# EAGLE board MD20A (EAGLE 9.6.2)
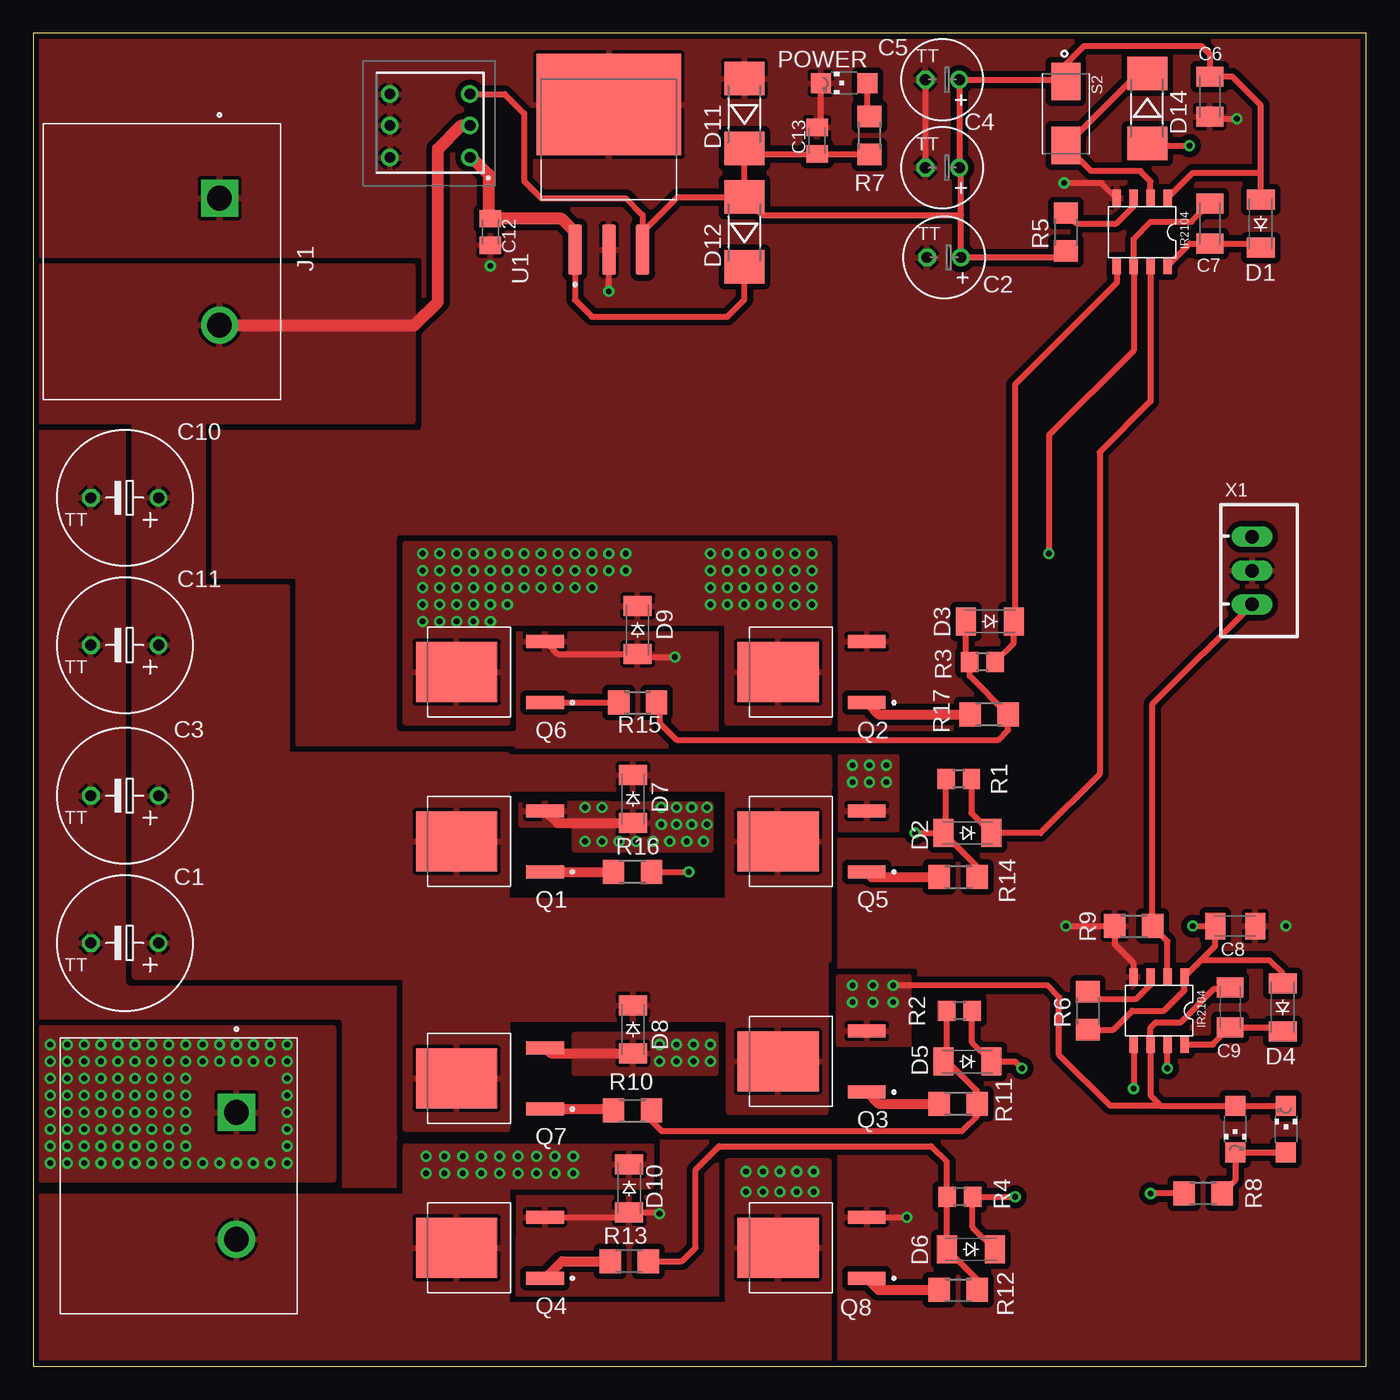
[diagram p0: board, top side]
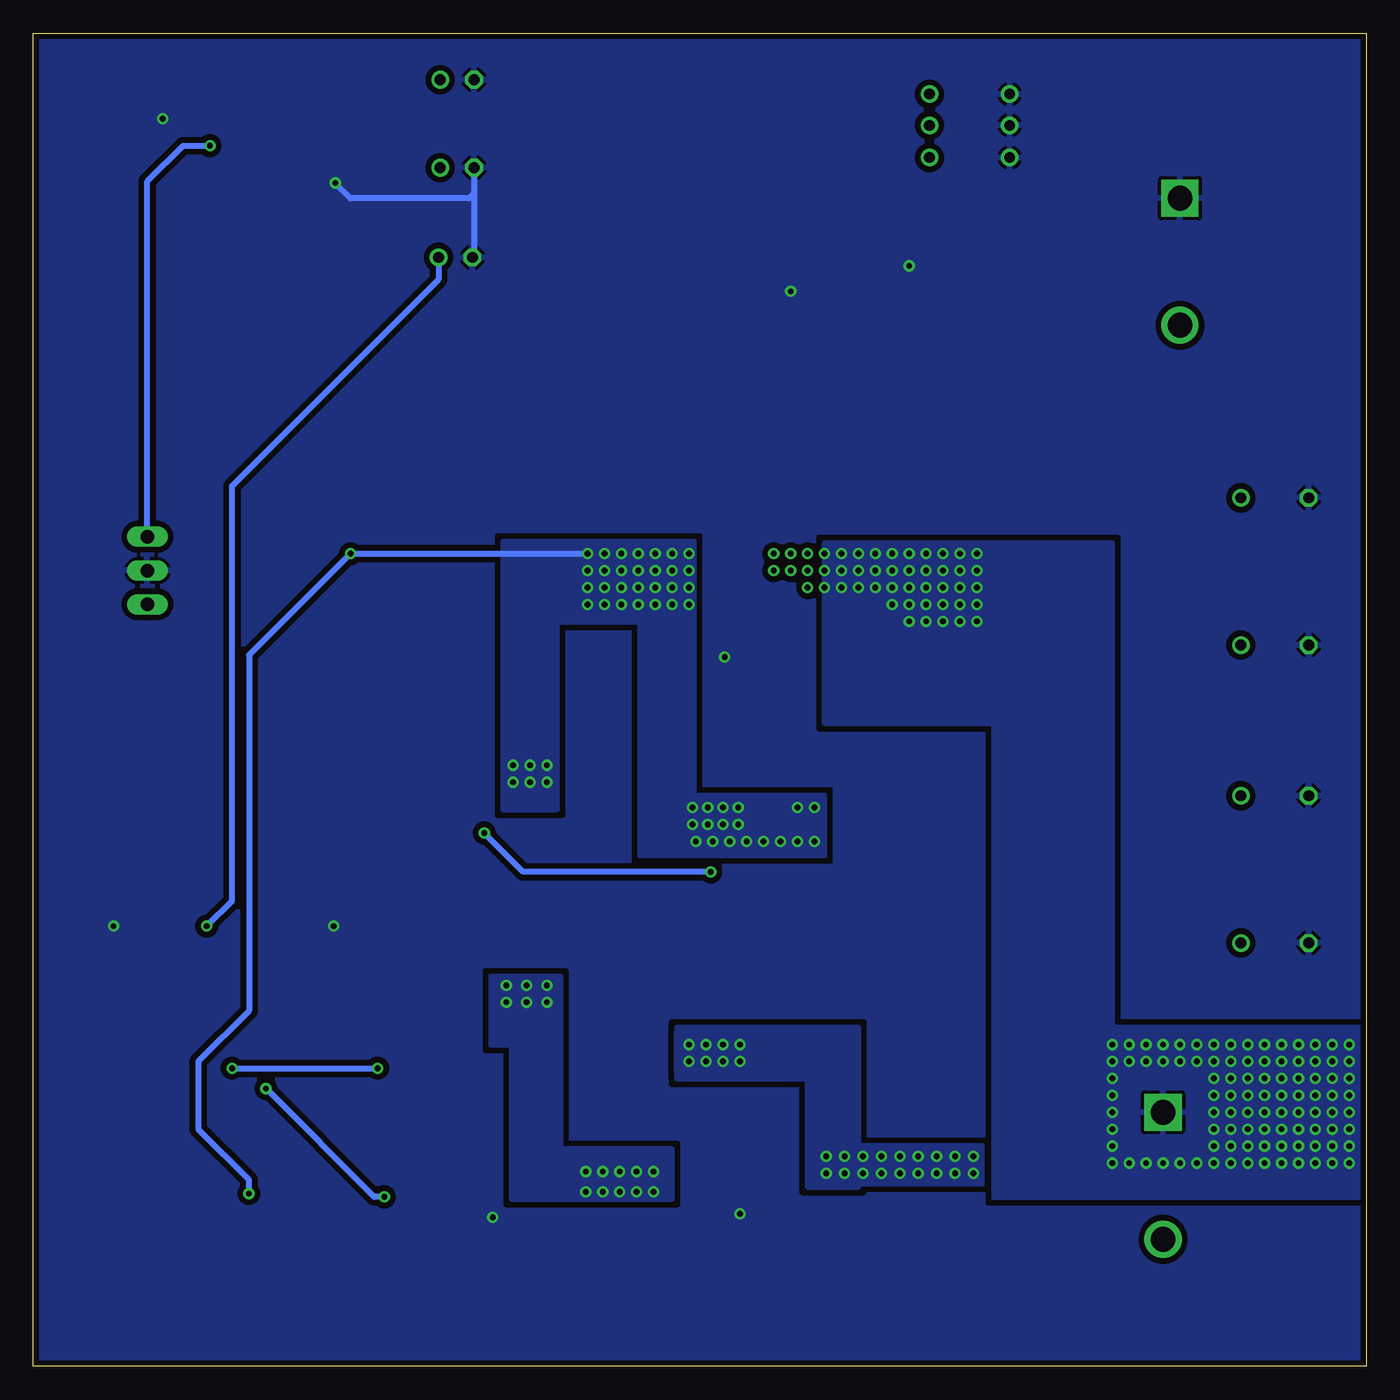
[diagram p1: board, bottom side, seen from below]

Size 100 x 100 mm. Coordinates in mm from the lower left corner, seen from the top.
Outline: 0,0 100,0 100,100 0,100 0,0
Copper layers (1*16): Top 0.035mm / dielectric 1.5mm / Bottom 0.035mm
Design rules "default *": minimum track width 17mil, minimum drill 17mil, track to track 17mil, track to pad 17mil, pad to pad 17mil, via to via 17mil, smd to smd 6mil, copper to edge 17mil, drill to drill 17mil, minimum pad ring 10mil, minimum via ring 8mil, stop-mask expansion 4mil, vias tented up to drill 0mil, thermal gap 10mil

## Footprints (pad centres in the part's own frame; a part is rotated, then mirrored left to right if it is on the bottom)
TT5D10 = drill 0.813: + -2.54,0 | drill 0.813 octagon: - 2.54,0
TT2D6 = drill 0.813: + -1.27,0 | drill 0.813 octagon: - 1.27,0
C1206K = smd 1.5 x 2: 1 -1.5,0; 2 1.5,0
C0805K = smd 1.3 x 1.6: 1 -1,0; 2 1,0
SOD-123_MINI-SMA = smd 1.5 x 2.1: A 1.8,0; C -1.8,0
MELF-MLL41 = smd 2.5 x 3: A 2.625,0; C -2.625,0
TE_4-1437652-6 = drill 1.854 pad 2.204 square: 1 0,0 | drill 1.854 pad 2.204: 2 9.53,0
CHIPLED_1206 = smd 1.5 x 1.5: A 0,-1.75; C 0,1.75
TO229P990X239-3_4N = smd 2.83 x 0.97: 1 -6.65,2.29; 3 -6.65,-2.29 | smd 6.1 x 4.49: 4 0,0
R0805 = smd 1.3 x 1.5: 1 -0.95,0; 2 0.95,0
R1206 = smd 1.6 x 1.803: 1 -1.422,0; 2 1.422,0
TL2230 = drill 0.8 pad 1.3: 1 -0.762,-1.016; 2 1.655,-1.016; 3 4,-1.016; 4 -0.762,5; 5 1.655,5; 6 4,5
SW_147873-2 = smd 2.8 x 2.2: 1 -2.4,0; 2 2.4,0
TO254P1524X483-4N = smd 3.79 x 0.99: 1 -6.4,2.54; 2 -6.4,0; 3 -6.4,-2.54 | smd 7.62 x 10.84: 4 4.48,0
IR2104S = smd 1.27 x 0.635: 1 0,3.81; 2 0,2.54; 3 0,1.27; 4 0,0; 5 5.08,0; 6 5.08,1.27; 7 5.08,2.54; 8 5.08,3.81
JST-XH-03-PACKAGE-LONG-PAD = drill 1.016 long: 1 -2.54,0; 2 0,0; 3 2.54,0

## Placement (x,y rotation side)
C1  100uf 53V  [TT5D10]  6.86,31.75 180 top
C2  47uf 25V  [TT2D6]  68.33,83.19 180 top
C3  330uf 50V  [TT5D10]  6.86,42.8 180 top
C4  47uf 25V  [TT2D6]  68.2,89.92 180 top
C5  47uf 25V  [TT2D6]  68.2,96.52 180 top
C6  100nf  [C1206K]  88.27,95.25 90 top
C7  1uf  [C1206K]  88.27,85.72 90 top
C8  100nf  [C1206K]  90.17,33.02 180 top
C9  1uf  [C1206K]  89.79,26.92 90 top
C10  330uf 50V  [TT5D10]  6.86,65.15 180 top
C11  330uf 50V  [TT5D10]  6.86,54.1 180 top
C12  470nf  [C0805K]  34.29,85.09 270 top
C13  10uf  [C0805K]  58.8,91.95 90 top
D1  1N5819  [SOD-123_MINI-SMA]  92.08,85.72 90 top
D2  1N4148  [SOD-123_MINI-SMA]  70.08,40.01 180 top
D3  1N4148  [SOD-123_MINI-SMA]  71.75,55.88 180 top
D4  1N5819  [SOD-123_MINI-SMA]  93.73,26.92 90 top
D5  1N4148  [SOD-123_MINI-SMA]  70.08,22.86 180 top
D6  1N4148  [SOD-123_MINI-SMA]  70.33,8.76 180 top
D7  1N5819  [SOD-123_MINI-SMA]  44.99,42.55 270 top
D8  1N5819  [SOD-123_MINI-SMA]  44.99,25.27 270 top
D9  1N5819  [SOD-123_MINI-SMA]  45.34,55.24 270 top
D10  1N5819  [SOD-123_MINI-SMA]  44.7,13.34 270 top
D11  1N4007  [MELF-MLL41]  53.34,93.98 90 top
D12  1N4007  [MELF-MLL41]  53.34,85.09 90 top
D14  1N4007  [MELF-MLL41]  83.57,94.36 270 top
J1  4-1437652-6  [TE_4-1437652-6]  13.97,87.63 270 top
J2  4-1437652-6  [TE_4-1437652-6]  15.24,19.05 270 top
LED2  REV  [CHIPLED_1206]  90.17,17.78 180 top
LED3  FOR  [CHIPLED_1206]  93.98,17.78 0 top
POWER  [CHIPLED_1206]  60.83,96.27 90 top
Q1  IRLR7843TRPBF  [TO229P990X239-3_4N]  31.75,39.37 180 top
Q2  IRLR7843TRPBF  [TO229P990X239-3_4N]  55.88,52.07 180 top
Q3  IRLR7843TRPBF  [TO229P990X239-3_4N]  55.88,22.86 180 top
Q4  IRLR7843TRPBF  [TO229P990X239-3_4N]  31.75,8.89 180 top
Q5  IRLR7843TRPBF  [TO229P990X239-3_4N]  55.88,39.37 180 top
Q6  IRLR7843TRPBF  [TO229P990X239-3_4N]  31.75,52.07 180 top
Q7  IRLR7843TRPBF  [TO229P990X239-3_4N]  31.75,21.59 180 top
Q8  IRLR7843TRPBF  [TO229P990X239-3_4N]  55.88,8.89 180 top
R1  33/27  [R0805]  69.43,44.07 180 top
R2  33/27  [R0805]  69.49,26.67 180 top
R3  33/27  [R0805]  71.2,52.83 180 top
R4  33/27  [R0805]  69.51,12.7 180 top
R5  10k  [R1206]  77.47,85.09 90 top
R6  10k  [R1206]  79.12,26.67 90 top
R7  10k  [R1206]  62.74,92.33 270 top
R8  10k  [R1206]  87.76,12.95 0 top
R9  10k  [R1206]  82.55,33.02 180 top
R10  50/100  [R1206]  44.96,19.18 180 top
R11  50/100  [R1206]  69.39,19.68 0 top
R12  50/100  [R1206]  69.39,5.71 180 top
R13  50/100  [R1206]  44.7,7.87 0 top
R14  50/100  [R1206]  69.39,36.7 180 top
R15  50/100  [R1206]  45.34,49.78 180 top
R16  50/100  [R1206]  44.96,37.08 0 top
R17  50/100  [R1206]  71.7,48.9 0 top
S1  TL2230  [TL2230]  31.75,91.44 90 top
S2  147873-2  [SW_147873-2]  77.47,93.98 270 top
U1  LM7812SX/NOPB  [TO254P1524X483-4N]  43.18,90.17 90 top
U$1  IR2104S  [IR2104S]  81.28,87.63 270 top
U$2  IR2104S  [IR2104S]  82.55,29.21 270 top
X1  JST-XH-03-PIN-LONG-PAD  [JST-XH-03-PACKAGE-LONG-PAD]  91.44,59.69 270 top

## Library data of the parts
C1-C13 = rcl; SPICEPREFIX: C
D1-D10 = diode
D11 D12 D14 = M7- diode
J1 J2 = terminal 9.52mm; AVAILABILITY: In Stock; COMMENT: 4-1437652-6; DESCRIPTION: Conn Terminal Block 2 POS 9.53mm Solder ST Thru-Hole 25A/Contact; EU_ROHS_COMPLIANCE: Compliant; MF: TE Connectivity / AMP; MP: 4-1437652-6; PACKAGE: None; PRICE: None; PURCHASE-URL: https://pricing.snapeda.com/search/part/4-1437652-6/?ref=eda
LED2 LED3 POWER = led
Q1-Q8 = IRLR7843TRPBF; AVAILABILITY: In Stock; DESCRIPTION: RoHS Compliant | Industry-leading quality | Low RDS(ON) at 4.5V VGS | Fully Characterized Avalanche Voltage and Current | Ultra-Low Gate Impedance | Logic Level; MF: Infineon Technologies; MP: IRLR7843TRPBF; PACKAGE: TO-252-3 Infineon; PRICE: None; PURCHASE-URL: https://pricing.snapeda.com/search/part/IRLR7843TRPBF/?ref=eda
R1-R17 = rcl; SPICEPREFIX: R
S1 = Latching switch-TL2230O; ARROW_PART_NUMBER: TL2230OAF100; DESCRIPTION: Tactile Switches 100mA 30VDCMomentary; HEIGHT: 12.5mm; MANUFACTURER_NAME: E-Switch; MANUFACTURER_PART_NUMBER: TL2230OAF100; MOUSER_PART_NUMBER: 612-TL2230OAF100; MOUSER_PRICE-STOCK: https://www.mouser.co.uk/ProductDetail/E-Switch/TL2230OAF100?qs=fi7yB2oewZlE2iWFXd0o2g%3D%3D
S2 = smd-Tactile-Switch; AVAILABILITY: In Stock; COMMENT: 147873-2; DESCRIPTION: Switch Tactile OFF (ON) SPST Rectangular Button J-Bend 0.05A 24VDC 1.77N SMD T/R; MF: TE Connectivity; MP: 147873-2; PACKAGE: None; PRICE: None; PURCHASE-URL: https://pricing.snapeda.com/search/part/147873-2/?ref=eda
U1 = LM7812SX_NOPB; AVAILABILITY: In Stock; DESCRIPTION: 1.5-A, 30-V, linear voltage regulator; MF: Texas Instruments; MP: LM7812SX/NOPB; PACKAGE: TO-263-3 Texas Instruments; PRICE: None; PURCHASE-URL: https://pricing.snapeda.com/search/part/LM7812SX/NOPB/?ref=eda
U$1 U$2 = IR2104S; AVAILABILITY: In Stock; DESCRIPTION: Half-Bridge Gate Driver IC Non-Inverting 8-SOIC; MF: Infineon Technologies; MP: IR2104S; PACKAGE: SO-8 Infineon; PRICE: None; PURCHASE-URL: https://pricing.snapeda.com/search/part/IR2104S/?ref=eda
X1 = JST Connectors v1-0

## Nets
12V: C2.+ C4.+ C5.+ C6.2 C8.2 C13.1 D1.A D4.A D11.C D12.A R5.1 R6.1 R7.2 S1.3 S2.1 U1.3 U$1.1 U$2.1
N$1: POWER.A R7.1
N$2: R5.2 U$1.3
N$3: C7.1 D1.C U$1.8
N$4: LED2.C LED3.A R8.2
N$5: D2.C R1.1 U$1.7
N$6: D14.A X1.1
N$7: D3.C R3.1 U$1.5
N$8: Q5.1 R14.2
N$9: C9.1 D4.C U$2.8
N$10: Q6.1 R15.2
N$11: Q1.1 R16.1
N$12: Q8.1 R12.2
N$13: D6.C R4.1 U$2.5
N$14: D5.C R2.1 U$2.7
N$15: R6.2 U$2.3
N$16: Q2.1 R17.1
N$17: Q7.1 R10.2
N$18: Q3.1 R11.1
N$20: Q4.1 R13.1
PE: C1.- C2.- C3.- C4.- C5.- C6.1 C8.1 C10.- C11.- C12.2 C13.2 D9.A D10.A D11.A J1.1 POWER.C Q2.3 Q4.3 Q6.3 Q8.3 R9.2 S1.4 S1.5 S1.6 U1.2 U1.4 U$1.4 U$2.4 X1.2
PWM_F: D14.C S2.2 U$1.2
PWM_R: R9.1 U$2.2 X1.3
Q1: D2.A R1.2 R14.1 R16.2
Q2: D3.A R3.2 R15.1 R17.2
Q3: D5.A R2.2 R10.1 R11.2
Q4: D6.A R4.2 R12.1 R13.2
V+: C12.1 D12.C S1.1 U1.1
VCC: C1.+ C3.+ C10.+ C11.+ D7.C D8.C J1.2 Q1.4 Q3.4 Q5.4 Q7.4 S1.2
VS_1: C7.2 D7.A D9.C J2.1 Q1.3 Q2.4 Q5.3 Q6.4 R8.1 U$1.6
VS_2: C9.2 D8.A D10.C J2.2 LED2.A LED3.C Q3.3 Q4.4 Q7.3 Q8.4 U$2.6

## Tracks (layer width: path | path; a pad name or v marks a point on that pad's centre or on a via)
12V  (via drill 0.43)
  Top 0.432: S1.3 35.37,95.44 36.83,93.98 36.83,88.9 38.1,87.63 44.45,87.63 45.72,86.36 U1.3 45.72,85.09 48.34,87.72 D12.A | D12.A D11.C 53.75,90.95 C13.1 62.7,90.95 R7.2 | 69.6,86.36 C2.+ 76.99,83.19 R5.1 | 69.6,86.36 69.6,89.79 C4.+ C5.+ 77.33,96.52 S2.1 77.47,97.66 78.87,99.06 87.63,99.06 88.27,98.42 C6.2 89.94,96.75 92.08,94.61 92.08,89.53 | D1.A 92.08,89.53 | U$1.1 87,89.53 92.08,89.53 | 87.63,30.48 U$2.1 86.36,28.19 84.84,26.67 82.45,26.67 81.03,25.25 R6.1 | 87.63,30.48 88.67,31.52 C8.2 v87,33.02 | 87.63,30.48 92.71,30.48 93.73,29.46 D4.A | D12.A 54.7,86.36 69.6,86.36
  Bottom 0.432: C2.+ 69.6,81.53 85.09,66.04 85.09,34.92 v87,33.02
N$1
  Top 0.432: R7.1 62.58,93.91 POWER.A
N$2
  Top 0.432: R5.2 78.26,85.72 81.24,85.72 82.55,87.03 U$1.3
N$3
  Top 0.432: D1.C 91.78,84.22 C7.1 86.77,84.22 U$1.8
N$4
  Top 0.432: LED3.A LED2.C 90.17,13.95 R8.2
N$5
  Top 0.432: R1.1 70.38,41.51 D2.C 75.56,40.01 80.01,44.45 80.01,68.58 83.82,72.39 U$1.7 83.89,82.48
N$6  (via drill 0.43)
  Top 0.432: D14.A 83.73,91.57 v86.74,91.57
  Bottom 0.432: X1.1 91.44,88.9 88.77,91.57 v86.74,91.57
N$7
  Top 0.432: R3.1 73.56,54.23 D3.C 73.66,55.98 73.66,73.66 81.28,81.28 U$1.5 81.22,82.49
N$8
  Top 0.762: Q5.1 62.91,36.7 R14.2
N$9
  Top 0.432: U$2.8 88.5,24.13 C9.1 93.43,25.42 D4.C
N$10
  Top 0.432: Q6.1 R15.2
N$11
  Top 0.762: Q1.1 R16.1
N$12
  Top 0.762: Q8.1 63.41,5.71 R12.2
N$13  (via drill 0.43)
  Top 0.432: D6.C 70.46,10.43 R4.1 v73.66,12.7 | U$2.5 v82.55,20.83
  Bottom 0.432: v73.66,12.7 74.42,12.7 v82.55,20.83
N$14  (via drill 0.43)
  Top 0.432: R2.1 70.44,24.3 D5.C 73.66,22.86 v74.17,22.35 | v85.09,22.35 U$2.7
  Bottom 0.432: v85.09,22.35 v74.17,22.35
N$15
  Top 0.432: R6.2 79.65,27.56 82.77,27.56 83.82,28.61 U$2.3
N$16
  Top 0.762: Q2.1 63.41,48.9 R17.1
N$17
  Top 0.762: Q7.1 43.41,19.3 R10.2
N$18
  Top 0.762: Q3.1 63.41,19.68 R11.1
N$20
  Top 0.762: Q4.1 39.67,7.87 R13.1
PE  (via drill 0.43)
  Top 0.432: C13.2 59.08,93.23 POWER.C | C5.- C4.- | C6.1 88.42,93.6 v90.3,93.6 | U$2.4 82.55,30.23 81.13,31.65 R9.2 v77.47,33.02 | U$1.4 80.14,88.77 v77.34,88.77 | Q6.3 39.31,53.45 D9.A 45.57,53.21 v48.13,53.21 | Q4.3 44.35,11.18 D10.A 46.88,11.54 v46.99,11.43 | Q8.3 v65.53,11.18 | v43.18,80.64 U1.2
  Bottom 0.432: v77.34,88.77 76.2,87.63 67.31,87.63 66.93,88.01 C4.- 66.93,83.31 C2.-
  other vias: 34.29,82.55 93.98,33.02
  pour Top: 0,83.82 0,100.33 28.57,100.33 28.57,83.82
  pour Top: 37.85,90.17 49.53,90.17 49.53,95.25 60.96,95.25 60.96,100.33 27.94,100.33 27.94,97.79 37.85,97.79
  pour Top: 60.96,100.33 67.31,100.33 68.07,99.57 68.07,93.98 65.15,93.98 65.15,99.06 60.96,99.06
  pour Top: 0,29.21 0,67.31 6.1,67.31 6.1,29.21
  pour Bottom (rank 2): 0,100.33 101.6,100.33 101.6,0 0,0
  pour Top (rank 2): 0,100.33 101.6,100.33 101.6,0 0,0
PWM_F
  Top 0.432: D14.C 82.88,96.99 S2.2 79.39,89.66 83.06,89.66 83.82,88.9 U$1.2
PWM_R
  Top 0.432: U$2.2 85.09,31.88 83.97,32.99 R9.1 83.97,49.68 X1.3
Q1  (via drill 0.43)
  Top 0.432: R14.1 70.82,37.47 D2.A | D2.A 68.47,40.2 R1.2 | R16.2 v49.18,37.08 | v66.17,40.01 D2.A
  Bottom 0.432: v49.18,37.08 63.25,37.08 v66.17,40.01
Q2
  Top 0.432: D3.A 69.95,53.13 R3.2 70.25,51.77 R17.2 73.12,47.73 72.39,46.99 48.26,46.99 46.99,48.26 46.99,49.55 R15.1
Q3
  Top 0.432: D5.A 68.43,23.01 | 68.43,23.01 68.54,23.12 R2.2 | 68.43,23.01 70.82,20.62 R11.2 70.82,18.8 69.67,17.65 47.14,17.65 46.38,18.41 R10.1
Q4
  Top 0.432: 68.53,12.67 D6.A 70.82,6.48 R12.1 | 68.53,12.67 68.53,15.34 67.36,16.51 51.46,16.51 49.68,14.73 49.68,8.89 48.67,7.87 R13.2 | 68.53,12.67 R4.2
V+
  Top 0.432: U1.1 40.64,80.01 41.91,78.74 52.07,78.74 53.34,80.01 D12.C
  Top 0.889: S1.1 32.89,90.68 34.16,89.41 34.16,86.22 C12.1 39.64,86.09 40.64,85.09 U1.1
VCC
  Top 0.889: J1.2 28.57,78.1 30.35,79.88 30.35,91.31 32.14,93.1 S1.2
  pour Top: 0,82.55 28.45,82.55 28.45,70.87 0,70.87
  pour Top: 7.62,29.21 7.62,82.55 28.45,82.55 28.45,70.87 12.7,70.87 12.7,29.21
  pour Top: 27.94,43.18 27.94,30.48 59.69,30.48 59.69,43.18 52.07,43.18 52.07,34.92 35.56,34.92 35.56,43.18
  pour Top: 27.94,17.78 27.94,33.02 59.44,33.02 59.44,19.05 52.2,19.05 52.2,26.04 35.56,26.04 35.56,17.78
  pour Top: 27.94,43.31 27.94,45.72 59.69,45.72 59.69,43.31
  pour Top: 7.62,58.42 7.62,29.21 35.56,29.21 35.56,45.85 19.05,45.85 19.05,58.42
VS_1  (via drill 0.43)
  Top 0.432: 82.61,82.48 U$1.6 | U$1.6 82.55,84.58 83.82,85.85 86.89,85.85 C7.2 | U$1.6 82.55,76.2 76.2,69.85 v76.2,60.96 | R8.1 v83.82,12.95
  Top 0.762: Q1.3 39.31,40.74 D7.A
  Bottom 0.432: v58.42,60.96 v76.2,60.96 83.82,53.34 83.82,26.67 87.63,22.86 87.63,17.78 83.82,13.97 v83.82,12.95
  other vias: 8.89,19.05 7.62,19.05 6.35,19.05 5.08,19.05 3.81,19.05 2.54,19.05 1.27,19.05 1.27,20.32 2.54,20.32 3.81,20.32 5.08,20.32 6.35,20.32 7.62,20.32 8.89,20.32 10.16,20.32 11.43,20.32 10.16,19.05 11.43,19.05 11.43,17.78 10.16,17.78 8.89,17.78 7.62,17.78 6.35,17.78 5.08,17.78 3.81,17.78 2.54,17.78 1.27,17.78 1.27,16.51 2.54,16.51 3.81,16.51 5.08,16.51 6.35,16.51 7.62,16.51 8.89,16.51 10.16,16.51 11.43,16.51 1.27,15.24 2.54,15.24 5.08,15.24 3.81,15.24 6.35,15.24 7.62,15.24 8.89,15.24 10.16,15.24 11.43,15.24 12.7,15.24 13.97,15.24 15.24,15.24 16.51,15.24 17.78,15.24 19.05,15.24 19.05,16.51 19.05,17.78 19.05,21.59 11.43,21.59 10.16,21.59 8.89,21.59 7.62,21.59 6.35,21.59 5.08,21.59 3.81,21.59 2.54,21.59 1.27,21.59 1.27,22.86 1.27,24.13 2.54,24.13 2.54,22.86 3.81,24.13 3.81,22.86 5.08,24.13 5.08,22.86 6.35,24.13 6.35,22.86 7.62,24.13 7.62,22.86 8.89,24.13 8.89,22.86 10.16,24.13 10.16,22.86 11.43,24.13 11.43,22.86 12.7,24.13 12.7,22.86 13.97,24.13 13.97,22.86 15.24,24.13 15.24,22.86 16.51,24.13 16.51,22.86 17.78,24.13 17.78,22.86 19.05,24.13 19.05,22.86 29.21,59.69 30.48,59.69 31.75,59.69 33.02,59.69 34.29,59.69 35.56,59.69 35.56,58.42 34.29,58.42 33.02,58.42 31.75,58.42 30.48,58.42 29.21,58.42 29.21,57.15 29.21,55.88 30.48,55.88 30.48,57.15 31.75,57.15 31.75,55.88 33.02,57.15 33.02,55.88 34.29,57.15 35.56,57.15 34.29,55.88 29.21,60.96 30.48,60.96 31.75,60.96 33.02,60.96 34.29,60.96 35.56,60.96 19.05,20.32 19.05,19.05 36.83,60.96 38.1,60.96 39.37,60.96 40.64,60.96 41.91,60.96 43.18,60.96 44.45,60.96 41.91,58.42 40.64,58.42 39.37,58.42 36.83,58.42 38.1,58.42 36.83,59.69 38.1,59.69 39.37,59.69 40.64,59.69 41.91,59.69 43.18,59.69 44.45,59.69 50.8,60.96 52.07,60.96 53.34,60.96 54.61,60.96 55.88,60.96 57.15,60.96 58.42,59.69 57.15,59.69 55.88,59.69 54.61,59.69 53.34,59.69 52.07,59.69 50.8,59.69 50.8,58.42 52.07,58.42 53.34,58.42 54.61,58.42 55.88,58.42 57.15,58.42 58.42,58.42 50.8,57.15 52.07,57.15 53.34,57.15 54.61,57.15 55.88,57.15 57.15,57.15 58.42,57.15 41.4,41.91 41.4,39.37 42.67,41.91 42.67,39.37 43.94,39.37 45.21,39.37 46.48,39.37 47.12,40.64 47.12,41.91 48.26,41.91 48.26,40.64 47.75,39.37 49.4,41.91 49.4,40.64 49.02,39.37 50.55,41.91 50.55,40.64 50.29,39.37 61.47,45.09 62.74,45.09 64.01,45.09 61.47,43.81 62.74,43.81 64.01,43.81
  pour Top: 27.94,48.26 27.94,61.72 59.69,61.72 59.69,48.26 52.07,48.26 52.07,55.75 35.56,55.75 35.56,48.26
  pour Top: 0,13.97 0,25.4 22.48,25.4 22.48,13.97
  pour Bottom: 0,12.7 0,25.4 19.05,25.4 19.05,61.72 40.64,61.72 40.64,48.26 27.94,48.26 27.94,12.7
  pour Top: 40.64,42.16 50.8,42.16 50.8,38.73 40.64,38.73
  pour Top: 43.18,42.16 36.58,42.16 36.58,40.64 43.18,40.64
  pour Bottom: 40.64,42.8 50.42,42.8 50.42,61.72 59.69,61.72 59.69,55.88 54.48,55.88 54.48,38.35 40.64,38.35
  pour Top: 60.58,40.26 60.58,45.72 64.77,45.72 64.77,40.26
  pour Bottom: 60.71,41.78 60.71,55.88 50.42,55.88 50.42,61.85 64.77,61.85 64.77,41.78
VS_2  (via drill 0.43)
  Top 0.432: LED3.C LED2.A 84.61,19.53 | 84.61,19.53 83.82,20.32 U$2.6 83.82,25.4 84.23,25.81 86.08,25.81 88.57,28.3 89.66,28.3 C9.2 | 84.61,19.53 82.91,19.53 80.8,19.53 76.96,23.37 76.96,27.69 76.07,28.57 v64.52,28.57
  Top 0.762: Q7.3 38.81,23.47 D8.A
  other vias: 53.47,13.08 54.74,13.08 56.01,13.08 57.28,13.08 58.55,13.08 61.47,27.3 62.99,27.3 64.52,27.3 29.46,15.75 30.85,15.75 29.46,14.48 32.23,14.48 30.85,14.48 32.23,15.75 33.61,15.75 34.99,15.75 36.37,15.75 37.75,15.75 39.13,15.75 40.51,15.75 33.61,14.48 34.99,14.48 36.37,14.48 37.75,14.48 39.13,14.48 40.51,14.48 46.99,24.13 48.26,24.13 49.53,24.13 50.8,24.13 46.99,22.86 48.26,22.86 49.53,22.86 50.8,22.86 53.47,14.61 54.74,14.61 56.01,14.61 57.28,14.61 58.55,14.61 61.47,28.57 62.99,28.57
  pour Top: 27.94,12.7 27.94,0 59.69,0 59.69,15.37 52.07,15.37 52.07,4.57 35.56,4.57 35.56,12.7
  pour Top: 27.94,12.7 0,12.7 0,0 27.94,0
  pour Top: 60.45,24.13 60.45,29.21 65.66,29.21 65.66,24.13
  pour Top: 27.94,10.16 27.94,16.51 46.35,16.51 46.35,13.46 35.56,13.46 35.56,10.16
  pour Top: 40.64,24.89 51.18,24.89 51.18,21.97 40.64,21.97
  pour Bottom: 28.83,16.51 41.4,16.51 41.4,13.72 28.83,13.72
  pour Bottom: 45.72,25.15 45.72,21.97 51.69,21.97 51.69,25.15
  pour Bottom: 38.1,13.46 38.1,25.4 51.69,25.4 51.69,21.59 41.91,21.59 41.91,13.46
  pour Bottom: 52.07,12.57 52.07,16.26 60.45,16.26 60.45,29.21 65.66,29.21 65.66,24.13 64.14,24.13 64.14,12.57